# EAGLE board Arduino Single LED - Task 1 EE (EAGLE 9.7.0)

Size 141.77 x 59.69 mm. Coordinates in mm from the lower left corner, seen from the top.
Outline: 0,0 141.77,0 141.77,59.69 0,59.69 0,0
Copper layers (1*16): Top 0.035mm / dielectric 1.5mm / Bottom 0.035mm
Design rules "default": minimum track width 6mil, minimum drill 0.35mm, track to track 6mil, track to pad 6mil, pad to pad 6mil, via to via 6mil, smd to smd 6mil, copper to edge 40mil, drill to drill 6mil, minimum pad ring 10mil, minimum via ring 8mil, stop-mask expansion 4mil, vias tented up to drill 0mil, thermal gap 10mil

## Footprints (pad centres in the part's own frame; a part is rotated, then mirrored left to right if it is on the bottom)
LEDRD254W60D565H860B = drill 0.981 pad 1.581: 1 -1.27,0; 2 1.27,0
LED-RGB-5MM = drill 0.9: B 0.635,0.635; C -0.635,-0.635; G 1.905,-0.635; R -1.905,0.635
RESAD1016W63L850D250B = drill 0.83 pad 1.43: 1 -5.08,0; 2 5.08,0
SWITCH-MOMENTARY-PTH-6.5MM = drill 1.016 pad 1.88: 1 -3.251,2.261; 2 3.251,2.261; 3 -3.251,-2.261; 4 3.251,-2.261
ARDUINO-UNO-R3-SHIELD = drill 1.016 pad 1.88: 3.3V 24.13,-2.54; 5V 24.13,0; A0 24.13,12.7; A1 24.13,15.24; A2 24.13,17.78; A3 24.13,20.32; A4 24.13,22.86; A5 24.13,25.4; AREF -24.13,-13.97; D2 -24.13,20.32; D3 -24.13,17.78; D4 -24.13,15.24; D5 -24.13,12.7; D6 -24.13,10.16; D7 -24.13,7.62; D8 -24.13,3.81; D9 -24.13,1.27; D10 -24.13,-1.27; D11 -24.13,-3.81; D12 -24.13,-6.35; D13 -24.13,-8.89; GND@0 24.13,2.54; GND@1 24.13,5.08; GND@2 -24.13,-11.43; IOREF 24.13,-7.62; NC 24.13,-10.16; RES 24.13,-5.08; RX -24.13,25.4; SCL -24.13,-19.05; SDA -24.13,-16.51; TX -24.13,22.86; VIN 24.13,7.62

## Placement (x,y rotation side)
D1  RED  [LEDRD254W60D565H860B]  109.38,35.51 180 top
D2  RED  [LEDRD254W60D565H860B]  104.3,35.51 180 top
D3  RED  [LEDRD254W60D565H860B]  99.22,35.51 180 top
D4  RED  [LEDRD254W60D565H860B]  114.46,35.51 180 top
D5  LED-RGBRCBG-PTH  [LED-RGB-5MM]  122.08,35.51 0 top
R1  350  [RESAD1016W63L850D250B]  97.95,27.89 90 top
R2  350  [RESAD1016W63L850D250B]  103.03,27.89 90 top
R3  350  [RESAD1016W63L850D250B]  108.11,27.89 90 top
R4  350  [RESAD1016W63L850D250B]  113.19,27.89 90 top
R5  30  [RESAD1016W63L850D250B]  120.81,27.89 90 top
SP1  SWITCH_MOMENTARY  [SWITCH-MOMENTARY-PTH-6.5MM]  133.51,29.16 90 top
UEYE_LED  ARDUINO-UNO-R3-SHIELD  [ARDUINO-UNO-R3-SHIELD]  47.88,29.84 270 top

## Library data of the parts
D1-D4 = Tinkercad; CATEGORY: Opto-Electronic; SUB-CATEGORY: LED; VALUE: LED_RED
D5 R1-R5 SP1 UEYE_LED = Tinkercad

## Nets
D1_C: D1.2 R3.2
D2_C: D2.2 R2.2
D3_C: D3.2 R1.2
D4_C: D4.2 R4.2
D5_C: D5.C R5.2
UEYE_LED_D2: R1.1 R2.1 R3.1 R4.1 R5.1 SP1.3 SP1.4 UEYE_LED.D2
UEYE_LED_D4: D1.1 D2.1 D3.1 D4.1 D5.G D5.R UEYE_LED.D4
UEYE_LED_GND: SP1.1 SP1.2 UEYE_LED.GND@0 UEYE_LED.GND@1 UEYE_LED.GND@2

## Tracks (layer width: path | path; a pad name or v marks a point on that pad's centre or on a via)
D1_C  (1 unrouted)
D2_C  (1 unrouted)
D3_C  (1 unrouted)
D4_C  (1 unrouted)
D5_C  (1 unrouted)
UEYE_LED_D2  (7 unrouted)
UEYE_LED_D4  (6 unrouted)
UEYE_LED_GND  (4 unrouted)